# Altium PCB PDM.PcbDoc (part 3 of 4)
Units mm, origin at the board's own origin, x right, y up, seen from the top; angles counter-clockwise.
Board outline 144.75 x 149.75 mm, 4 copper layers (Top Layer, GND, 3V3, Bottom Layer), stack 1.792 mm thick; 174 components, 85 nets, 467 pads, 47 vias.
Unrouted connection lines stored in the file: 147.
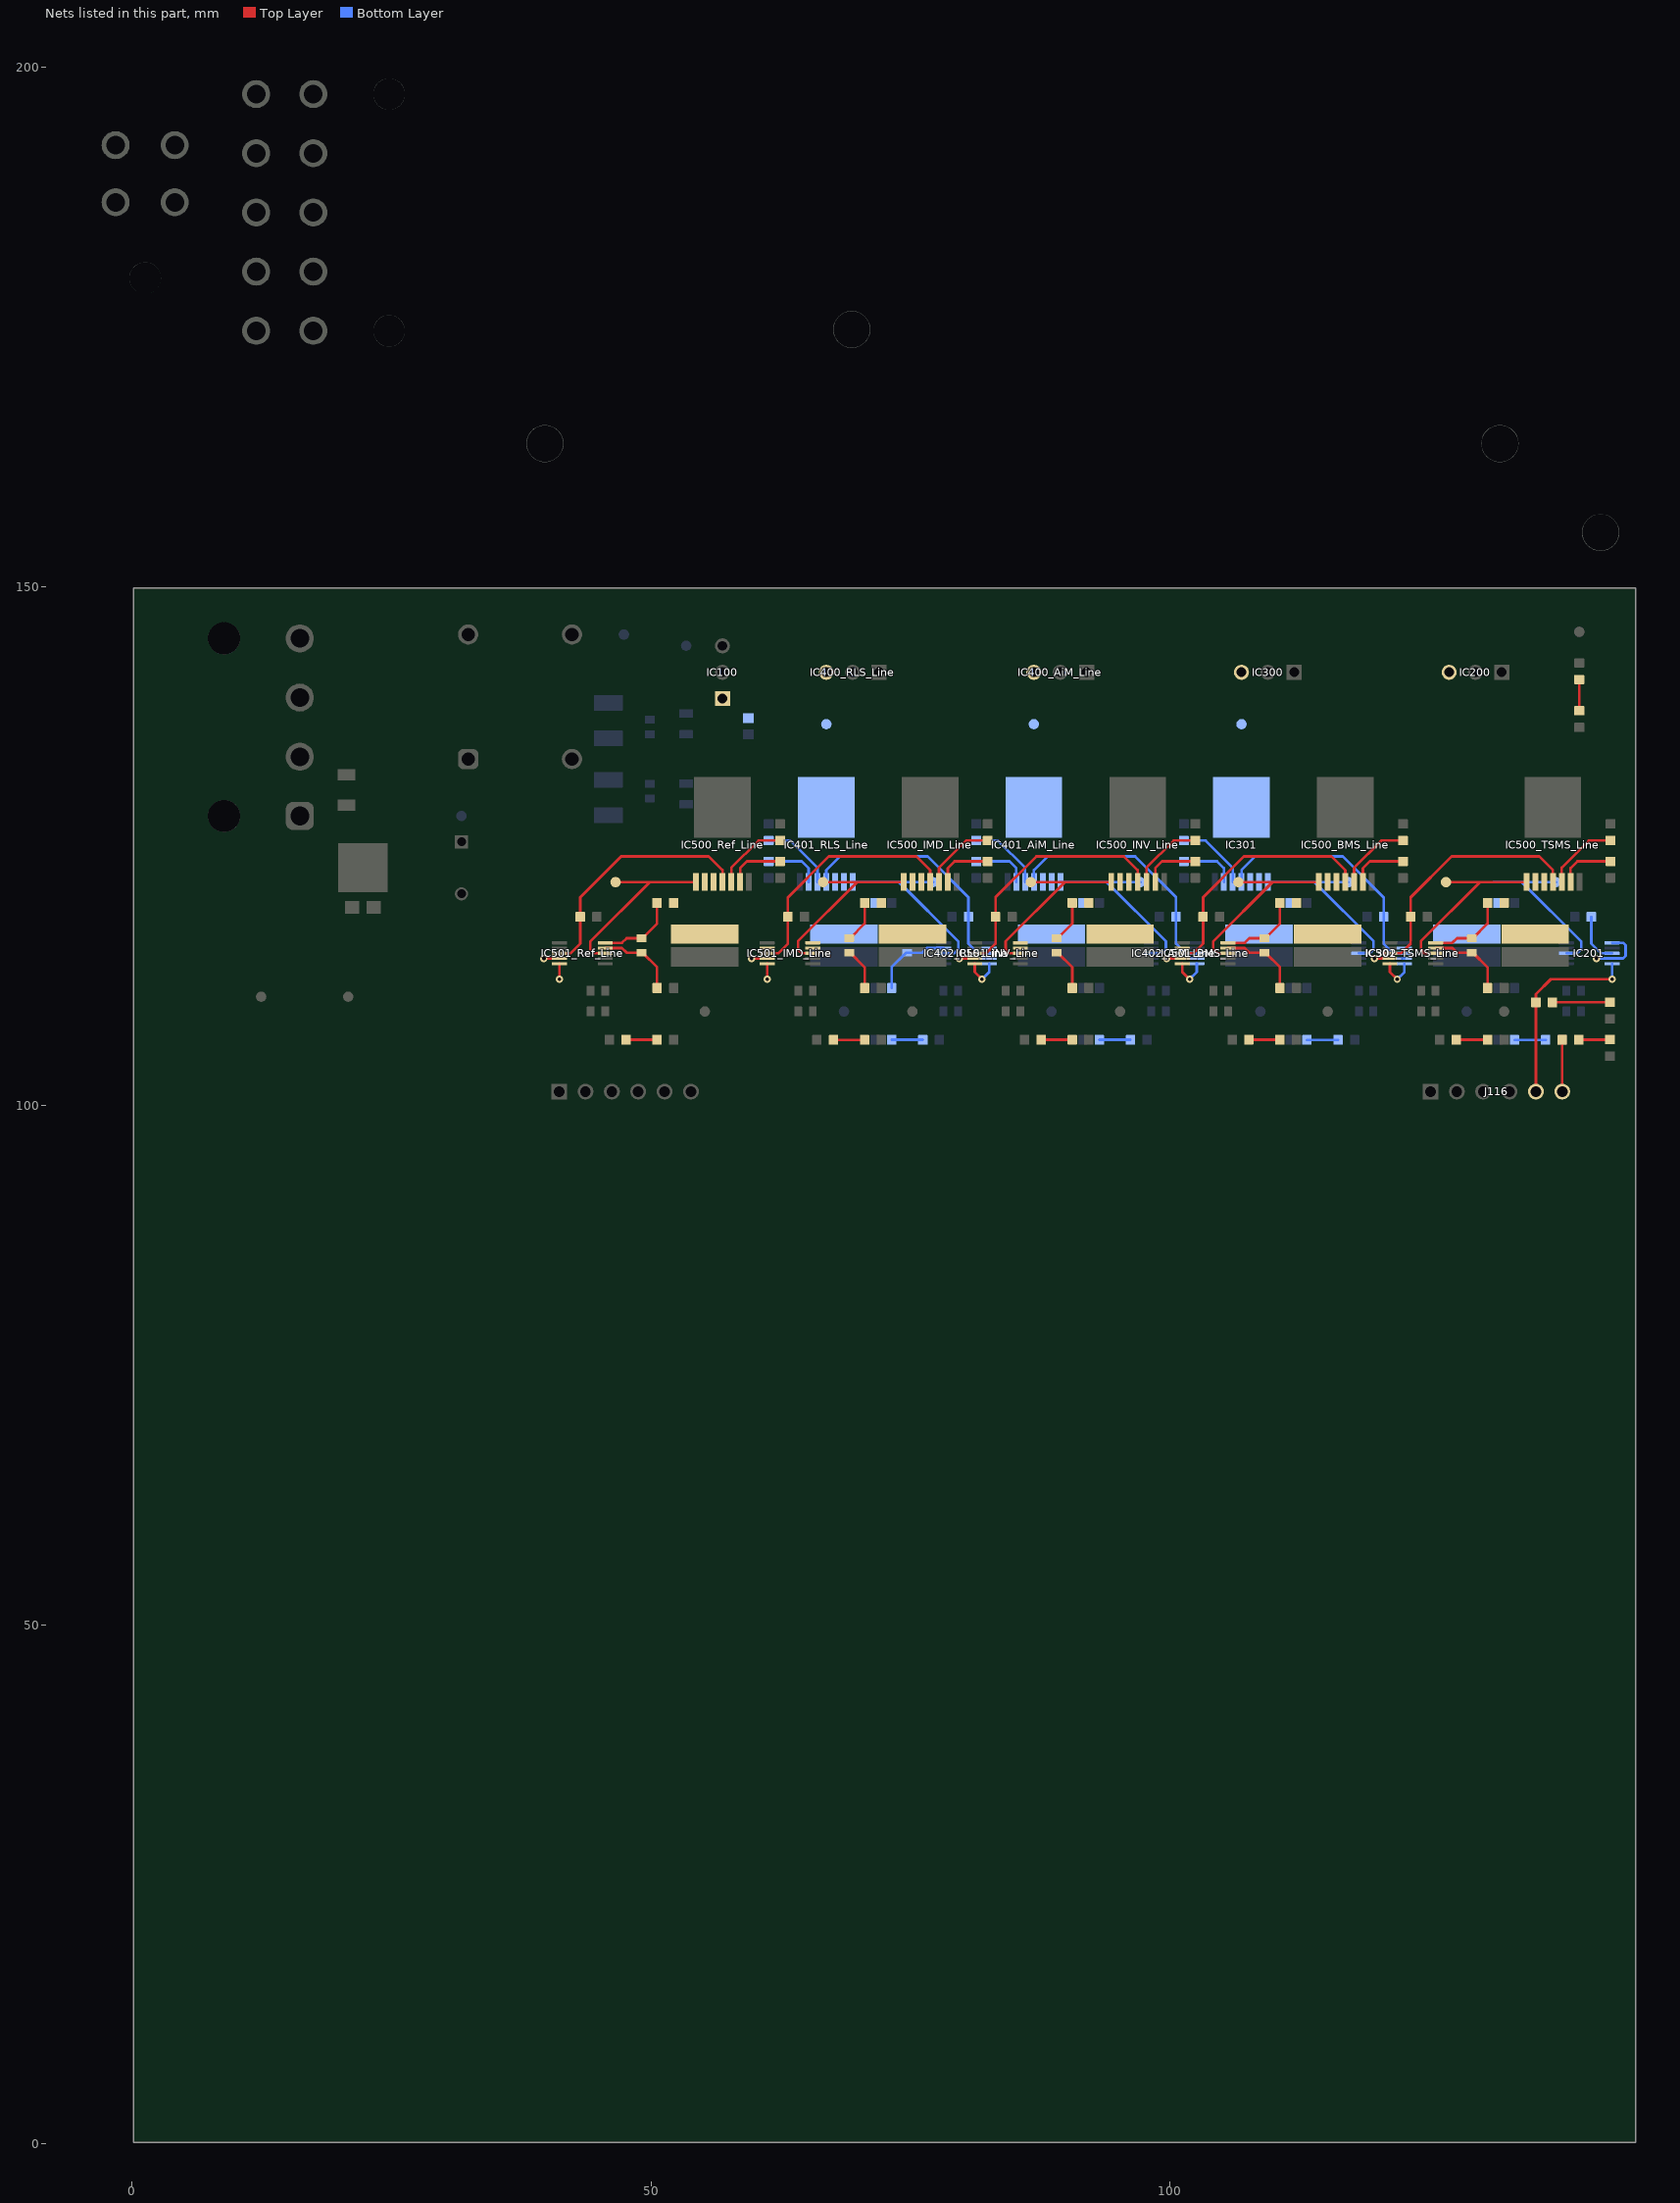
[diagram p3: the nets of this part, all layers, seen from the top]

## Via types
v1: diameter 0.7, hole 0.35, Top Layer to Bottom Layer, 47 vias

## Nets (pads, with @x,y where several pads share a name; then routed paths per layer and width w, separated by ;. In a path a pad name is that pad's centre, name@x,y a point inside that pad or via, vN(x,y) a via of type N, cw(c..) or ccw(c..) an arc to the next point about the centre after c; other vN are vias at no path point) (continued)
NetC400_RLS_Line_2: C400_RLS_Line.2 IC402_RLS_Line.9 R404_RLS_Line.1 | length 7.8
  Bottom Layer w0.254: R404_RLS_Line.1@73.185,111.326 73.185,113.321 74.59,114.726 C400_RLS_Line.2@74.685,114.726 76.121,114.726 76.571,115.176 IC402_RLS_Line.9@78.185,115.176
NetC500_BMS_Line_1: C500_BMS_Line.1 IC501_BMS_Line.10 R504_BMS_Line.1 | length 7.7
  Top Layer w0.254: IC501_BMS_Line.10@105.585,115.676 107.198,115.676 107.648,116.126 C500_BMS_Line.1@109.085,116.126 ; C500_BMS_Line.1@109.18,116.126 110.585,117.531 R504_BMS_Line.1@110.585,119.526
NetC500_BMS_Line_2: C500_BMS_Line.2 IC501_BMS_Line.9 R505_BMS_Line.1 | length 7.7
  Top Layer w0.254: IC501_BMS_Line.9@105.585,115.176 107.198,115.176 107.648,114.726 C500_BMS_Line.2@109.085,114.726 ; C500_BMS_Line.2@109.18,114.726 110.585,113.321 R505_BMS_Line.1@110.585,111.326
NetC500_IMD_Line_1: C500_IMD_Line.1 IC501_IMD_Line.10 R504_IMD_Line.1 | length 4
  Top Layer w0.254: C500_IMD_Line.1@69.18,116.126 70.585,117.531 R504_IMD_Line.1@70.585,119.526
NetC500_IMD_Line_2: C500_IMD_Line.2 IC501_IMD_Line.9 R505_IMD_Line.1 | length 4
  Top Layer w0.254: C500_IMD_Line.2@69.18,114.726 70.585,113.321 R505_IMD_Line.1@70.585,111.326
NetC500_INV_Line_1: C500_INV_Line.1 IC501_INV_Line.10 R504_INV_Line.1 | length 4
  Top Layer w0.254: C500_INV_Line.1@89.18,116.126 90.585,117.531 R504_INV_Line.1@90.585,119.526
NetC500_INV_Line_2: C500_INV_Line.2 IC501_INV_Line.9 R505_INV_Line.1 | length 4
  Top Layer w0.254: C500_INV_Line.2@89.18,114.726 90.585,113.321 R505_INV_Line.1@90.585,111.326
NetC500_Ref_Line_1: C500_Ref_Line.1 IC501_Ref_Line.10 R504_Ref_Line.1 | length 7.8
  Top Layer w0.254: IC501_Ref_Line.10@45.585,115.676 47.198,115.676 47.648,116.126 C500_Ref_Line.1@49.085,116.126 49.18,116.126 50.585,117.531 R504_Ref_Line.1@50.585,119.526
NetC500_Ref_Line_2: C500_Ref_Line.2 IC501_Ref_Line.9 R505_Ref_Line.1 | length 7.8
  Top Layer w0.254: IC501_Ref_Line.9@45.585,115.176 47.198,115.176 47.648,114.726 C500_Ref_Line.2@49.085,114.726 49.18,114.726 50.585,113.321 R505_Ref_Line.1@50.585,111.326
NetC500_TSMS_Line_1: C500_TSMS_Line.1 IC501_TSMS_Line.10 R504_TSMS_Line.1 | length 7.7
  Top Layer w0.254: IC501_TSMS_Line.10@125.585,115.676 127.198,115.676 127.648,116.126 C500_TSMS_Line.1@129.085,116.126 ; C500_TSMS_Line.1@129.18,116.126 130.585,117.531 R504_TSMS_Line.1@130.585,119.526
NetC500_TSMS_Line_2: C500_TSMS_Line.2 IC501_TSMS_Line.9 R505_TSMS_Line.1 | length 7.7
  Top Layer w0.254: IC501_TSMS_Line.9@125.585,115.176 127.198,115.176 127.648,114.726 C500_TSMS_Line.2@129.085,114.726 ; C500_TSMS_Line.2@129.18,114.726 130.585,113.321 R505_TSMS_Line.1@130.585,111.326
NetF100_2: F100.2 IC100.1
NetIC200_3: IC200.3 IC201.8 R200.2 R202.2 TP200.1 | length 16.4
  Bottom Layer w0.254: 131.191,121.526 133.896,121.526 ; TP200.1@137.185,121.526 TP200.1@137.139,121.526 133.896,121.526 ; IC201.8@138.185,114.676 139.226,114.676 139.605,115.055 139.605,115.817 133.896,121.526
NetIC201_3: IC201.3 R204.2 | length 5
  Bottom Layer w0.254: R204.2@140.585,118.176 140.585,115.603 141.512,114.676 IC201.3@142.585,114.676
NetIC300_3: IC300.3 IC301.Tab TP300.1
NetIC301_1: IC301.1 IC301.2 IC301.3 IC302.8 R302.2 R304.2 TP301.1 | length 18.2
  Bottom Layer w0.254: IC301.1@109.435,121.526 113.896,121.526 ; TP301.1@117.185,121.526 113.896,121.526 ; IC302.8@118.185,114.676 119.226,114.676 119.605,115.055 119.605,115.817 113.896,121.526
NetIC301_4: IC301.4 IC302.3 R306.2 | length 23.9
  Bottom Layer w0.254: IC301.4@106.885,121.526 106.885,122.677 108.21,124.003 116.642,124.003 120.585,120.06 R306.2@120.585,118.176 120.585,115.603 121.512,114.676 IC302.3@122.585,114.676
NetIC301_5: IC301.5 R300.1 | length 7.2
  Bottom Layer w0.254: R300.1@101.335,125.526 103.419,125.526 106.035,122.91 IC301.5@106.035,121.526
NetIC301_6: IC301.6 R301.1 | length 5.5
  Bottom Layer w0.254: R301.1@101.335,123.526 104.529,123.526 105.185,122.871 IC301.6@105.185,121.526
NetIC400_AiM_Line_3: IC400_AiM_Line.3 IC401_AiM_Line.Tab TP400_AiM_Line.1
NetIC400_RLS_Line_3: IC400_RLS_Line.3 IC401_RLS_Line.Tab TP400_RLS_Line.1
NetIC401_AiM_Line_1: IC401_AiM_Line.1 IC401_AiM_Line.2 IC401_AiM_Line.3 IC402_AiM_Line.8 R401_AiM_Line.2 R403_AiM_Line.2 TP401_AiM_Line.1 | length 18.2
  Bottom Layer w0.254: IC401_AiM_Line.1@89.435,121.526 93.896,121.526 ; TP401_AiM_Line.1@97.185,121.526 93.896,121.526 ; IC402_AiM_Line.8@98.185,114.676 99.226,114.676 99.605,115.055 99.605,115.817 93.896,121.526
NetIC401_AiM_Line_4: IC401_AiM_Line.4 IC402_AiM_Line.3 R406_AiM_Line.2 | length 23.9
  Bottom Layer w0.254: IC401_AiM_Line.4@86.885,121.526 86.885,122.677 88.21,124.003 96.642,124.003 100.585,120.06 R406_AiM_Line.2@100.585,118.176 100.585,115.603 101.512,114.676 IC402_AiM_Line.3@102.585,114.676
NetIC401_AiM_Line_5: IC401_AiM_Line.5 R400_AiM_Line.1 | length 7.2
  Bottom Layer w0.254: 81.335,125.526 83.419,125.526 86.035,122.91 IC401_AiM_Line.5@86.035,121.526
NetIC401_AiM_Line_6: IC401_AiM_Line.6 R402_AiM_Line.1 | length 5.5
  Bottom Layer w0.254: 81.335,123.526 84.529,123.526 85.185,122.871 IC401_AiM_Line.6@85.185,121.526
NetIC401_RLS_Line_1: IC401_RLS_Line.1 IC401_RLS_Line.2 IC401_RLS_Line.3 IC402_RLS_Line.8 R401_RLS_Line.2 R403_RLS_Line.2 TP401_RLS_Line.1 | length 18.2
  Bottom Layer w0.254: IC401_RLS_Line.1@69.435,121.526 73.896,121.526 ; TP401_RLS_Line.1@77.185,121.526 73.896,121.526 ; IC402_RLS_Line.8@78.185,114.676 79.226,114.676 79.605,115.055 79.605,115.817 73.896,121.526
NetIC401_RLS_Line_4: IC401_RLS_Line.4 IC402_RLS_Line.3 R406_RLS_Line.2 | length 23.9
  Bottom Layer w0.254: IC401_RLS_Line.4@66.885,121.526 66.885,122.677 68.21,124.003 76.642,124.003 80.585,120.06 R406_RLS_Line.2@80.585,118.176 80.585,115.603 81.512,114.676 IC402_RLS_Line.3@82.585,114.676
NetIC401_RLS_Line_5: IC401_RLS_Line.5 R400_RLS_Line.1 | length 7.2
  Bottom Layer w0.254: 61.335,125.526 63.419,125.526 66.035,122.911 IC401_RLS_Line.5@66.035,121.526
NetIC401_RLS_Line_6: IC401_RLS_Line.6 R402_RLS_Line.1 | length 5.5
  Bottom Layer w0.254: 61.335,123.526 64.529,123.526 65.185,122.871 IC401_RLS_Line.6@65.185,121.526
NetIC500_BMS_Line_1: IC500_BMS_Line.1 IC500_BMS_Line.2 IC500_BMS_Line.3 IC501_BMS_Line.8 R502_BMS_Line.2 R504_BMS_Line.2 TP501_BMS_Line.1 | length 18.2
  Top Layer w0.254: IC501_BMS_Line.8@105.585,114.676 104.543,114.676 104.164,115.055 104.164,115.817 109.873,121.526 ; TP501_BMS_Line.1@106.585,121.526 109.873,121.526 ; IC500_BMS_Line.1@114.335,121.526 109.873,121.526
NetIC500_BMS_Line_4: IC500_BMS_Line.4 IC501_BMS_Line.3 R506_BMS_Line.1 | length 23.9
  Top Layer w0.254: IC501_BMS_Line.3@101.185,114.676 102.257,114.676 103.185,115.604 R506_BMS_Line.1@103.185,118.176 103.185,120.06 107.127,124.003 115.559,124.003 116.885,122.677 IC500_BMS_Line.4@116.885,121.526
NetIC500_BMS_Line_5: IC500_BMS_Line.5 R500_BMS_Line.1 | length 7.2
  Top Layer w0.254: IC500_BMS_Line.5@117.735,121.526 117.735,122.911 120.35,125.526 R500_BMS_Line.1@122.435,125.526
NetIC500_BMS_Line_6: IC500_BMS_Line.6 R501_BMS_Line.1 | length 5.5
  Top Layer w0.254: IC500_BMS_Line.6@118.585,121.526 118.585,122.871 119.24,123.526 R501_BMS_Line.1@122.435,123.526
NetIC500_IMD_Line_1: IC500_IMD_Line.1 IC500_IMD_Line.2 IC500_IMD_Line.3 IC501_IMD_Line.8 R502_IMD_Line.2 R504_IMD_Line.2 TP501_IMD_Line.1 | length 18.2
  Top Layer w0.254: IC501_IMD_Line.8@65.585,114.676 64.543,114.676 64.164,115.055 64.164,115.817 69.873,121.526 ; TP501_IMD_Line.1@66.585,121.526 69.873,121.526 ; IC500_IMD_Line.1@74.335,121.526 69.873,121.526
NetIC500_IMD_Line_4: IC500_IMD_Line.4 IC501_IMD_Line.3 R506_IMD_Line.1 | length 23.9
  Top Layer w0.254: IC501_IMD_Line.3@61.185,114.676 62.257,114.676 63.185,115.604 R506_IMD_Line.1@63.185,118.176 63.185,120.06 67.127,124.003 75.559,124.003 76.885,122.677 IC500_IMD_Line.4@76.885,121.526
NetIC500_IMD_Line_5: IC500_IMD_Line.5 R500_IMD_Line.1 | length 7.2
  Top Layer w0.254: IC500_IMD_Line.5@77.735,121.526 77.735,122.911 80.35,125.526 R500_IMD_Line.1@82.435,125.526
NetIC500_IMD_Line_6: IC500_IMD_Line.6 R501_IMD_Line.1 | length 5.5
  Top Layer w0.254: IC500_IMD_Line.6@78.585,121.526 78.585,122.871 79.24,123.526 R501_IMD_Line.1@82.435,123.526
NetIC500_INV_Line_1: IC500_INV_Line.1 IC500_INV_Line.2 IC500_INV_Line.3 IC501_INV_Line.8 R502_INV_Line.2 R504_INV_Line.2 TP501_INV_Line.1 | length 18.2
  Top Layer w0.254: IC501_INV_Line.8@85.585,114.676 84.543,114.676 84.164,115.055 84.164,115.817 89.873,121.526 ; TP501_INV_Line.1@86.585,121.526 89.873,121.526 ; IC500_INV_Line.1@94.335,121.526 89.873,121.526
NetIC500_INV_Line_4: IC500_INV_Line.4 IC501_INV_Line.3 R506_INV_Line.1 | length 23.9
  Top Layer w0.254: IC501_INV_Line.3@81.185,114.676 82.257,114.676 83.185,115.604 R506_INV_Line.1@83.185,118.176 83.185,120.06 87.127,124.003 95.559,124.003 96.885,122.677 IC500_INV_Line.4@96.885,121.526
NetIC500_INV_Line_5: IC500_INV_Line.5 R500_INV_Line.1 | length 7.2
  Top Layer w0.254: IC500_INV_Line.5@97.735,121.526 97.735,122.911 100.35,125.526 R500_INV_Line.1@102.435,125.526
NetIC500_INV_Line_6: IC500_INV_Line.6 R501_INV_Line.1 | length 5.5
  Top Layer w0.254: IC500_INV_Line.6@98.585,121.526 98.585,122.871 99.24,123.526 R501_INV_Line.1@102.435,123.526
NetIC500_Ref_Line_1: IC500_Ref_Line.1 IC500_Ref_Line.2 IC500_Ref_Line.3 IC501_Ref_Line.8 R502_Ref_Line.2 R504_Ref_Line.2 TP501_Ref_Line.1 | length 18.2
  Top Layer w0.254: IC501_Ref_Line.8@45.585,114.676 44.543,114.676 44.164,115.055 44.164,115.817 49.873,121.526 ; TP501_Ref_Line.1@46.585,121.526 49.873,121.526 ; IC500_Ref_Line.1@54.335,121.526 49.873,121.526
NetIC500_Ref_Line_4: IC500_Ref_Line.4 IC501_Ref_Line.3 R506_Ref_Line.1 | length 23.9
  Top Layer w0.254: IC501_Ref_Line.3@41.185,114.676 42.257,114.676 43.185,115.604 R506_Ref_Line.1@43.185,118.176 43.185,120.06 47.127,124.003 55.559,124.003 56.885,122.677 IC500_Ref_Line.4@56.885,121.526
NetIC500_Ref_Line_5: IC500_Ref_Line.5 R500_Ref_Line.1 | length 7.2
  Top Layer w0.254: IC500_Ref_Line.5@57.735,121.526 57.735,122.911 60.35,125.526 R500_Ref_Line.1@62.435,125.526
NetIC500_Ref_Line_6: IC500_Ref_Line.6 R501_Ref_Line.1 | length 5.5
  Top Layer w0.254: IC500_Ref_Line.6@58.585,121.526 58.585,122.871 59.24,123.526 R501_Ref_Line.1@62.435,123.526
NetIC500_TSMS_Line_1: IC500_TSMS_Line.1 IC500_TSMS_Line.2 IC500_TSMS_Line.3 IC501_TSMS_Line.8 R502_TSMS_Line.2 R504_TSMS_Line.2 TP501_TSMS_Line.1 | length 18.2
  Top Layer w0.254: IC501_TSMS_Line.8@125.585,114.676 124.543,114.676 124.164,115.055 124.164,115.817 129.873,121.526 ; TP501_TSMS_Line.1@126.585,121.526 129.873,121.526 ; IC500_TSMS_Line.1@134.335,121.526 129.873,121.526
NetIC500_TSMS_Line_4: IC500_TSMS_Line.4 IC501_TSMS_Line.3 R506_TSMS_Line.1 | length 23.9
  Top Layer w0.254: IC501_TSMS_Line.3@121.185,114.676 122.257,114.676 123.185,115.604 R506_TSMS_Line.1@123.185,118.176 123.185,120.06 127.127,124.003 135.559,124.003 136.885,122.677 IC500_TSMS_Line.4@136.885,121.526
NetIC500_TSMS_Line_5: IC500_TSMS_Line.5 R500_TSMS_Line.1 | length 7.2
  Top Layer w0.254: IC500_TSMS_Line.5@137.735,121.526 137.735,122.911 140.35,125.526 R500_TSMS_Line.1@142.435,125.526
NetIC500_TSMS_Line_6: IC500_TSMS_Line.6 R501_TSMS_Line.1 | length 5.5
  Top Layer w0.254: IC500_TSMS_Line.6@138.585,121.526 138.585,122.871 139.24,123.526 R501_TSMS_Line.1@142.435,123.526
NetL100_A: L100.A R100.1 | length 3
  Top Layer w0.254: L100.A@139.425,138.03 R100.1@139.425,141.03
NetL200_A: L200.A R201.1 | length 3
  Bottom Layer w0.254: R201.1@133.185,106.326 L200.A@136.185,106.326
NetL300_A: L300.A R303.1 | length 3
  Bottom Layer w0.254: R303.1@113.185,106.326 L300.A@116.185,106.326
NetL400_AiM_Line_A: L400_AiM_Line.A R405_AiM_Line.1 | length 3
  Bottom Layer w0.254: R405_AiM_Line.1@93.185,106.35 L400_AiM_Line.A@96.185,106.35
NetL400_RLS_Line_A: L400_RLS_Line.A R405_RLS_Line.1 | length 3
  Bottom Layer w0.254: R405_RLS_Line.1@73.185,106.35 L400_RLS_Line.A@76.185,106.35
NetL500_BMS_Line_A: L500_BMS_Line.A R503_BMS_Line.1 | length 3
  Top Layer w0.254: L500_BMS_Line.A@107.585,106.35 R503_BMS_Line.1@110.585,106.35
NetL500_IMD_Line_A: L500_IMD_Line.A R503_IMD_Line.1 | length 3
  Top Layer w0.254: L500_IMD_Line.A@67.585,106.326 R503_IMD_Line.1@70.585,106.326
NetL500_INV_Line_A: L500_INV_Line.A R503_INV_Line.1 | length 3
  Top Layer w0.254: L500_INV_Line.A@87.585,106.35 R503_INV_Line.1@90.585,106.35
NetL500_Ref_Line_A: L500_Ref_Line.A R503_Ref_Line.1 | length 3
  Top Layer w0.254: L500_Ref_Line.A@47.585,106.35 R503_Ref_Line.1@50.585,106.35
NetL500_TSMS_Line_A: L500_TSMS_Line.A R503_TSMS_Line.1 | length 3
  Top Layer w0.254: L500_TSMS_Line.A@127.585,106.35 R503_TSMS_Line.1@130.585,106.35
NetR101_2: R101.2 R103.2 | length 3
  Top Layer w0.254: R103.2@139.387,106.354 R101.2@142.387,106.354
NetR102_2: R102.2 R104.2 | length 5.5
  Top Layer w0.254: R104.2@136.847,109.954 R102.2@142.387,109.954
SCL: IC201.5 IC302.2 IC302.5 IC402_AiM_Line.5 IC402_RLS_Line.5 IC501_BMS_Line.2 IC501_BMS_Line.5 IC501_IMD_Line.5 IC501_INV_Line.5 IC501_Ref_Line.5 IC501_TSMS_Line.5 J116.5 R104.1 | length 32.6
  Top Layer w0.254: v1(41.185,112.176) IC501_Ref_Line.5@41.185,113.676 ; v1(61.185,112.176) IC501_IMD_Line.5@61.185,113.676 ; IC501_INV_Line.5@81.185,113.676 81.185,112.876 v1(81.885,112.176) ; IC501_BMS_Line.5@101.185,113.676 101.185,112.876 v1(101.885,112.176) ; IC501_TSMS_Line.5@121.185,113.676 121.185,112.876 v1(121.885,112.176) ; J116.5@135.247,101.354 R104.1@135.247,109.954 135.247,110.736 136.687,112.176 v1(142.585,112.176)
  Bottom Layer w0.254: v1(81.885,112.176) 82.585,112.876 IC402_RLS_Line.5@82.585,113.676 ; v1(101.885,112.176) 102.585,112.876 IC402_AiM_Line.5@102.585,113.676 ; v1(121.885,112.176) 122.585,112.876 IC302.5@122.585,113.676 ; v1(142.585,112.176) IC201.5@142.585,113.676
SDA: IC201.1 IC201.4 IC302.4 IC402_AiM_Line.4 IC402_RLS_Line.2 IC402_RLS_Line.4 IC501_BMS_Line.4 IC501_IMD_Line.2 IC501_IMD_Line.4 IC501_INV_Line.4 IC501_Ref_Line.4 IC501_TSMS_Line.4 J116.6 R103.1 | length 26.5
  Top Layer w0.254: v1(39.685,114.176) IC501_Ref_Line.4@41.185,114.176 ; v1(59.685,114.176) IC501_IMD_Line.4@61.185,114.176 ; v1(79.685,114.176) IC501_INV_Line.4@81.185,114.176 ; v1(99.685,114.176) IC501_BMS_Line.4@101.185,114.176 ; v1(119.685,114.176) IC501_TSMS_Line.4@121.185,114.176 ; J116.6@137.787,101.354 R103.1@137.787,106.354
  Bottom Layer w0.254: v1(79.685,114.176) IC402_RLS_Line.4@82.585,114.176 ; v1(99.685,114.176) IC402_AiM_Line.4@102.585,114.176 ; v1(119.685,114.176) IC302.4@122.585,114.176 ; v1(141.085,114.176) IC201.4@142.585,114.176 143.64,114.176 143.891,114.427 143.891,115.443 143.658,115.676 IC201.1@142.585,115.676
pads on no net: H100.1 H101.1 H102.1 H103.1 J100. J101. J109.5 J109.6 J117.1 J117.2 J117.3 J117.4 J117.5 J117.6

## Polygon pours and split planes (outlines as drawn)
NetIC500_INV_Line_1 on Top Layer "NETIC500_INV_LINE_1_L01_P033" (solid, pour order 33): 92.981,122.173 91.938,121.13 ccw(c92.792,120.276) 91.585,120.276 91.585,115.926 ccw(c92.084,115.926) 92.085,115.426 98.285,115.426 ccw(c98.285,115.926) 98.785,115.926 98.785,117.301 ccw(c97.577,117.301) 98.431,118.155 96.809,119.777 cw(c97.663,120.63) 96.456,120.63 96.456,122.526 93.835,122.526 ccw(c93.834,121.319)
NetIC500_TSMS_Line_1 on Top Layer "NETIC500_TSMS_LINE_1_L01_P035" (solid, pour order 35): 132.981,122.173 131.938,121.13 ccw(c132.792,120.276) 131.585,120.276 131.585,115.926 ccw(c132.084,115.926) 132.085,115.426 138.285,115.426 ccw(c138.285,115.926) 138.785,115.926 138.785,117.301 ccw(c137.577,117.301) 138.431,118.155 136.809,119.777 cw(c137.663,120.63) 136.456,120.63 136.456,122.526 133.835,122.526 ccw(c133.834,121.319)
NetIC500_BMS_Line_1 on Top Layer "NETIC500_BMS_LINE_1_L01_P034" (solid, pour order 34): 112.981,122.173 111.938,121.13 ccw(c112.792,120.276) 111.585,120.276 111.585,115.926 ccw(c112.084,115.926) 112.085,115.426 118.285,115.426 ccw(c118.285,115.926) 118.785,115.926 118.785,117.301 ccw(c117.577,117.301) 118.431,118.155 116.809,119.777 cw(c117.663,120.63) 116.456,120.63 116.456,122.526 113.835,122.526 ccw(c113.834,121.319)
NetIC500_IMD_Line_1 on Top Layer "NETIC500_IMD_LINE_1_L01_P032" (solid, pour order 32): 72.981,122.173 71.938,121.13 ccw(c72.792,120.276) 71.585,120.276 71.585,115.926 ccw(c72.084,115.926) 72.085,115.426 78.285,115.426 ccw(c78.285,115.926) 78.785,115.926 78.785,117.301 ccw(c77.577,117.301) 78.431,118.155 76.809,119.777 cw(c77.663,120.63) 76.456,120.63 76.456,122.526 73.835,122.526 ccw(c73.834,121.319)
NetIC500_Ref_Line_1 on Top Layer "NETIC500_REF_LINE_1_L01_P031" (solid, pour order 31): 52.981,122.173 51.938,121.13 ccw(c52.792,120.276) 51.585,120.276 51.585,115.926 ccw(c52.084,115.926) 52.085,115.426 58.285,115.426 ccw(c58.285,115.926) 58.785,115.926 58.785,117.301 ccw(c57.577,117.301) 58.431,118.155 56.809,119.777 cw(c57.663,120.63) 56.456,120.63 56.456,122.526 53.835,122.526 ccw(c53.834,121.319)
24V on Top Layer "24V_L01_P030" (solid, pour order 30): 79.725,149.909 145,150 145,125.526 42.368,125.526 cw(c42.368,128.009) 39.885,128.009 39.885,133.847 cw(c42.547,133.847) 42.547,136.509 53.661,136.509 ccw(c53.661,144.71) 59.464,138.915 63.861,143.319 cw(c79.757,127.446)
IN- on Top Layer "IN-_L01_P016" (solid, pour order 16): 16.167,130.4 cw(c16.167,127.897) 18.67,127.897 18.67,121.48 ccw(c20.09,121.48) 20.09,120.06 29.436,120.06 ccw(c29.436,121.267) 30.289,120.414 34.531,124.656 ccw(c33.678,125.509) 34.885,125.509 34.885,138.843 ccw(c33.678,138.843) 34.531,139.696 30.617,143.611 cw(c32.387,145.381) 30.617,147.151 cw(c32.383,145.385) 34.148,147.151 39.531,141.767 cw(c38.678,140.914) 39.885,140.914 39.885,123.438 cw(c38.678,123.438) 39.531,122.585 32.36,115.414 cw(c31.507,116.267) 31.507,115.06 18.67,115.06 cw(c18.67,120.06) 13.67,120.06 13.67,127.903 cw(c16.167,127.903)
NetC7_P on Top Layer "NETC7_P_L01_P015" (solid, pour order 15): 18.67,130.4 23.17,130.4 23.17,129.548 ccw(c24.529,129.548) 23.568,128.587 23.694,128.461 ccw(c24.547,129.315) 24.547,128.108 28.55,128.108 ccw(c28.55,129.315) 29.403,128.461 29.531,128.59 ccw(c28.678,129.443) 29.885,129.443 29.885,133.378 cw(c32.385,133.378) 32.385,135.878 cw(c32.385,133.378) 34.885,133.378 34.885,127.581 cw(c33.678,127.58) 34.531,126.727 28.218,120.414 cw(c27.365,121.267) 27.364,120.06 20.09,120.06 cw(c20.09,121.48) 18.67,121.48
IN+ on Top Layer "IN+_L01_P014" (solid, pour order 14): 17.97,131.1 18.67,130.4 23.17,130.4 23.17,133.416 ccw(c22.036,133.416) 22.838,134.218 21.31,135.746 ccw(c20.457,134.894) 20.456,136.1 16.17,136.1 ccw(c16.17,133.6) 13.67,133.6 ccw(c16.17,133.6) 16.17,131.1
IN+ on Top Layer "IN+_L01_P011" (solid, pour order 11): 17.97,131.1 18.67,130.4 23.17,130.4 23.17,133.416 ccw(c22.036,133.416) 22.838,134.218 21.31,135.746 ccw(c20.457,134.894) 20.456,136.1 16.17,136.1 ccw(c16.17,133.6) 13.67,133.6 ccw(c16.17,133.6) 16.17,131.1
NetC7_P on Top Layer "NETC7_P_L01_P012" (solid, pour order 12): 18.67,130.4 23.17,130.4 23.17,129.548 ccw(c24.529,129.548) 23.568,128.587 23.694,128.461 ccw(c24.547,129.315) 24.547,128.108 28.55,128.108 ccw(c28.55,129.315) 29.403,128.461 29.531,128.59 ccw(c28.678,129.443) 29.885,129.443 29.885,133.378 cw(c32.385,133.378) 32.385,135.878 cw(c32.385,133.378) 34.885,133.378 34.885,127.581 cw(c33.678,127.58) 34.531,126.727 28.218,120.414 cw(c27.365,121.267) 27.364,120.06 20.09,120.06 cw(c20.09,121.48) 18.67,121.48
IN- on Top Layer "IN-_L01_P013" (solid, pour order 13): 16.167,130.4 cw(c16.167,127.897) 18.67,127.897 18.67,121.48 ccw(c20.09,121.48) 20.09,120.06 29.436,120.06 ccw(c29.436,121.267) 30.289,120.414 34.531,124.656 ccw(c33.678,125.509) 34.885,125.509 34.885,138.843 ccw(c33.678,138.843) 34.531,139.696 30.617,143.611 cw(c32.387,145.381) 30.617,147.151 cw(c32.383,145.385) 34.148,147.151 39.531,141.767 cw(c38.678,140.914) 39.885,140.914 39.885,123.438 cw(c38.678,123.438) 39.531,122.585 32.36,115.414 cw(c31.507,116.267) 31.507,115.06 18.67,115.06 cw(c18.67,120.06) 13.67,120.06 13.67,127.903 cw(c16.167,127.903)
NetIC301_1 on Bottom Layer "NETIC301_1_L04_P042" (solid, pour order 42): 110.788,122.173 111.831,121.13 cw(c110.977,120.276) 112.185,120.276 112.185,115.926 cw(c111.685,115.926) 111.685,115.426 105.485,115.426 cw(c105.485,115.926) 104.985,115.926 104.985,117.301 cw(c106.192,117.301) 105.338,118.155 106.96,119.777 ccw(c106.106,120.63) 107.313,120.63 107.313,122.526 109.935,122.526 cw(c109.935,121.319)
NetIC401_AiM_Line_1 on Bottom Layer "NETIC401_AIM_LINE_1_L04_P041" (solid, pour order 41): 90.788,122.173 91.831,121.13 cw(c90.977,120.276) 92.185,120.276 92.185,115.926 cw(c91.685,115.926) 91.685,115.426 85.485,115.426 cw(c85.485,115.926) 84.985,115.926 84.985,117.301 cw(c86.192,117.301) 85.338,118.155 86.96,119.777 ccw(c86.106,120.63) 87.313,120.63 87.313,122.526 89.935,122.526 cw(c89.935,121.319)
NetIC401_RLS_Line_1 on Bottom Layer "NETIC401_RLS_LINE_1_L04_P040" (solid, pour order 40): 70.788,122.173 71.831,121.13 cw(c70.977,120.276) 72.185,120.276 72.185,115.926 cw(c71.685,115.926) 71.685,115.426 65.485,115.426 cw(c65.485,115.926) 64.985,115.926 64.985,117.301 cw(c66.192,117.301) 65.338,118.155 66.96,119.777 ccw(c66.106,120.63) 67.313,120.63 67.313,122.526 69.935,122.526 cw(c69.935,121.319)
24V on Bottom Layer "24V_L04_P029" (solid, pour order 29): 79.725,149.909 145,150 145,125.526 42.368,125.526 cw(c42.368,128.009) 39.885,128.009 39.885,133.847 cw(c42.547,133.847) 42.547,136.509 53.661,136.509 ccw(c53.661,144.71) 59.464,138.915 63.861,143.319 cw(c79.757,127.446)
NetIC200_3 on Bottom Layer "Bottom Layer-NetIC400_RLS_Line_3" (solid, pour order 27): 132.185,115.426 132.184,120.252 ccw(c130.978,120.252) 131.831,121.105 128.238,124.698 cw(c129.092,125.552) 127.885,125.552 127.885,141.74 ccw(c126.885,141.74) 126.885,142.74 ccw(c126.885,141.74) 125.885,141.74 125.884,120.176 cw(c124.678,120.176) 125.531,119.323 125.363,119.155 ccw(c126.276,118.242) 124.984,118.241 124.985,115.426
NetIC300_3 on Bottom Layer "Bottom Layer-NetIC400_RLS_Line_3" (solid, pour order 26): 109.814,125.526 ccw(c109.814,126.026) 110.314,126.026 110.314,130.164 ccw(c107.197,130.164) 109.401,132.367 109.029,132.739 cw(c111.791,135.502) 107.885,135.502 107.885,141.74 ccw(c106.885,141.74) 106.885,142.74 ccw(c106.885,141.74) 105.885,141.74 105.885,135.502 cw(c101.978,135.502) 104.74,132.739 104.368,132.367 ccw(c106.572,130.164) 103.456,130.164 103.456,126.026 ccw(c103.956,126.026) 103.956,125.526
NetIC400_AiM_Line_3 on Bottom Layer "Bottom Layer-NetIC400_RLS_Line_3" (solid, pour order 21): 89.814,125.526 ccw(c89.814,126.026) 90.314,126.026 90.314,130.164 ccw(c87.197,130.164) 89.401,132.367 89.029,132.739 cw(c91.791,135.502) 87.885,135.502 87.885,141.74 ccw(c86.885,141.74) 86.885,142.74 ccw(c86.885,141.74) 85.885,141.74 85.885,135.502 cw(c81.978,135.502) 84.74,132.739 84.368,132.367 ccw(c86.572,130.164) 83.456,130.164 83.456,126.026 ccw(c83.956,126.026) 83.956,125.526
NetIC400_RLS_Line_3 on Bottom Layer "Bottom Layer-NetIC400_RLS_Line_3" (solid, pour order 19): 69.814,125.526 ccw(c69.814,126.026) 70.314,126.026 70.314,130.164 ccw(c67.197,130.164) 69.401,132.367 69.029,132.739 cw(c71.791,135.502) 67.885,135.502 67.885,141.74 ccw(c66.885,141.74) 66.885,142.74 ccw(c66.885,141.74) 65.885,141.74 65.885,135.502 cw(c61.978,135.502) 64.74,132.739 64.368,132.367 ccw(c66.572,130.164) 63.456,130.164 63.456,126.026 ccw(c63.956,126.026) 63.956,125.526
no net on Bottom Layer "NONET_L04_P020" (solid, pour order 20): 63.419,125.526 70.314,125.526 70.314,130.454
IN+ on Bottom Layer "IN+_L04_P009" (solid, pour order 9): 17.97,131.1 18.67,130.4 23.17,130.4 23.17,133.416 ccw(c22.036,133.416) 22.838,134.218 21.31,135.746 ccw(c20.457,134.894) 20.456,136.1 16.17,136.1 ccw(c16.17,133.6) 13.67,133.6 ccw(c16.17,133.6) 16.17,131.1
NetC7_P on Bottom Layer "NETC7_P_L04_P008" (solid, pour order 8): 18.67,130.4 23.17,130.4 23.17,129.548 ccw(c24.529,129.548) 23.568,128.587 23.694,128.461 ccw(c24.547,129.315) 24.547,128.108 28.55,128.108 ccw(c28.55,129.315) 29.403,128.461 29.531,128.59 ccw(c28.678,129.443) 29.885,129.443 29.885,133.378 cw(c32.385,133.378) 32.385,135.878 cw(c32.385,133.378) 34.885,133.378 34.885,127.581 cw(c33.678,127.58) 34.531,126.727 28.218,120.414 cw(c27.365,121.267) 27.364,120.06 20.09,120.06 cw(c20.09,121.48) 18.67,121.48
IN- on Bottom Layer "IN-_L04_P010" (solid, pour order 10): 16.167,130.4 cw(c16.167,127.897) 18.67,127.897 18.67,121.48 ccw(c20.09,121.48) 20.09,120.06 29.436,120.06 ccw(c29.436,121.267) 30.289,120.414 34.531,124.656 ccw(c33.678,125.509) 34.885,125.509 34.885,138.843 ccw(c33.678,138.843) 34.531,139.696 30.617,143.611 cw(c32.387,145.381) 30.617,147.151 cw(c32.383,145.385) 34.148,147.151 39.531,141.767 cw(c38.678,140.914) 39.885,140.914 39.885,123.438 cw(c38.678,123.438) 39.531,122.585 32.36,115.414 cw(c31.507,116.267) 31.507,115.06 18.67,115.06 cw(c18.67,120.06) 13.67,120.06 13.67,127.903 cw(c16.167,127.903)
24V on 3V3 "24V_L03_P025" (solid, pour order 25): 79.725,149.909 145,150 145,125.526 42.368,125.526 cw(c42.368,128.009) 39.885,128.009 39.885,133.847 cw(c42.547,133.847) 42.547,136.509 53.661,136.509 ccw(c53.661,144.71) 59.464,138.915 63.861,143.319 cw(c79.757,127.446)

## Keep-outs
Keep-Out Layer:
  lines w0.254: 0,0 145,0 145,150 0,150 0,0

## Silkscreen, mask and mechanical layers (free items; w line width, h text height)
Top Overlay:
  circle w0.254: c58.785,117.801 r0.5
  circle w0.254: c56.456,120.13 r0.5
  circle w0.254: c58.785,115.426 r0.5
  circle w0.254: c51.585,115.426 r0.5
  circle w0.254: c51.585,120.776 r0.5
  circle w0.254: c53.335,122.526 r0.5
  lines w0.1: 51.085,115.426 52.085,115.426 ; 51.585,120.276 51.585,121.276 ; 52.981,122.173 53.688,122.88 ; 56.102,120.484 56.809,119.777 ; 58.285,115.426 59.285,115.426 ; 58.431,118.155 59.138,117.448
Mechanical 1:
  lines w0.254: 0,0 145,0 145,150 0,150 0,0
Mechanical 17:
  circle w0.013: c217.936,172.461 r1.45
  circle w0.013: c217.936,191.461 r1.45
  circle w0.013: c217.936,172.461 r1.25
  circle w0.013: c207.936,181.961 r9
  circle w0.013: c207.936,181.961 r8
  circle w0.013: c217.936,191.461 r1.25
  circle w0.006: c207.936,96.961 r0.003
  circle w0.013: c217.936,172.461 r1.45
  circle w0.013: c217.936,191.461 r1.45
  circle w0.013: c217.936,172.461 r1.25
  circle w0.013: c207.936,181.961 r9
  circle w0.013: c207.936,181.961 r8
  circle w0.013: c217.936,191.461 r1.25
  circle w0.006: c207.936,96.961 r0.003
  lines w0.013: 203.936,163.761 203.936,173.899 203.936,163.761 ; 203.936,163.761 203.936,165.761 ; 203.936,163.761 225.636,163.761 ; 203.936,163.761 203.936,165.761 ; 203.936,163.761 225.636,163.761 ; 203.936,165.761 223.636,165.761 ; 203.936,165.761 223.636,165.761 ; 203.936,198.161 203.936,200.161 ; 203.936,198.161 223.636,198.161 ; 203.936,198.161 203.936,190.024 203.936,198.161 ; 203.936,198.161 203.936,200.161 ; 203.936,198.161 223.636,198.161 ; 203.936,200.161 225.636,200.161 ; 203.936,200.161 225.636,200.161 ; 223.636,165.761 223.636,198.161 ; 223.636,165.761 223.636,198.161 ; 225.636,163.761 225.636,200.161 ; 225.636,163.761 225.636,200.161
Mechanical 18:
  circle w0.013: c207.936,145.961 r4
  circle w0.013: c158.936,145.961 r4
  circle w0.013: c158.936,47.961 r4
  circle w0.006: c207.936,96.961 r0.003
  circle w0.013: c207.936,145.961 r4
  circle w0.013: c158.936,145.961 r4
  circle w0.013: c158.936,47.961 r4
  circle w0.006: c207.936,96.961 r0.003
Mechanical 19:
  circle w0.013: c207.936,145.961 r2.2
  circle w0.013: c158.936,47.961 r4
  circle w0.013: c207.936,145.961 r4
  circle w0.013: c158.936,145.961 r4
  circle w0.006: c207.936,96.961 r0.003
  circle w0.013: c207.936,145.961 r2.2
  circle w0.013: c158.936,47.961 r4
  circle w0.013: c207.936,145.961 r4
  circle w0.013: c158.936,145.961 r4
  circle w0.006: c207.936,96.961 r0.003
Mechanical 21:
  circle w0.013: c207.936,208.161 r4
  circle w0.013: c207.936,208.161 r2.2
  circle w0.013: c158.936,145.961 r4
  circle w0.013: c158.936,47.961 r4
  circle w0.006: c207.936,96.961 r0.003
  circle w0.013: c207.936,208.161 r4
  circle w0.013: c207.936,208.161 r2.2
  circle w0.013: c158.936,145.961 r4
  circle w0.013: c158.936,47.961 r4
  circle w0.006: c207.936,96.961 r0.003
Mechanical 22:
  circle w0.013: c207.936,145.961 r4
  circle w0.013: c207.936,145.961 r2.2
  circle w0.013: c207.936,145.961 r4
  circle w0.013: c207.936,208.161 r4
  circle w0.013: c207.936,208.161 r2.2
  circle w0.013: c207.936,208.161 r4
  circle w0.006: c207.936,96.961 r0.003
  circle w0.013: c207.936,145.961 r4
  circle w0.013: c207.936,145.961 r2.2
  circle w0.013: c207.936,145.961 r4
  circle w0.013: c207.936,208.161 r4
  circle w0.013: c207.936,208.161 r2.2
  circle w0.013: c207.936,208.161 r4
  circle w0.006: c207.936,96.961 r0.003
  lines w0.013: 203.936,163.761 225.636,163.761 ; 203.936,163.761 203.936,145.961 203.936,163.761 ; 203.936,163.761 203.936,165.761 ; 203.936,163.761 225.636,163.761 ; 203.936,163.761 203.936,165.761 ; 203.936,165.761 223.636,165.761 ; 203.936,165.761 223.636,165.761 ; 203.936,198.161 223.636,198.161 ; 203.936,198.161 203.936,200.161 ; 203.936,198.161 223.636,198.161 ; 203.936,198.161 203.936,200.161 ; 203.936,200.161 225.636,200.161 ; 203.936,200.161 203.936,208.161 203.936,200.161 ; 203.936,200.161 225.636,200.161 ; 223.636,165.761 223.636,198.161 ; 223.636,165.761 223.636,198.161 ; 225.636,163.761 225.636,200.161 ; 225.636,163.761 225.636,200.161 ; 211.936,145.961 211.936,163.761 211.936,145.961 ; 211.936,200.161 211.936,208.161 211.936,200.161
Mechanical 23:
  circle w0.013: c158.936,47.961 r4
  circle w0.013: c158.936,145.961 r4
  circle w0.013: c256.936,96.961 r2.2
  circle w0.013: c256.936,145.961 r2.2
  circle w0.006: c270.936,80.061 r0.003
  circle w0.006: c207.936,96.961 r0.003
  circle w0.006: c287.936,153.961 r0.003
  circle w0.013: c158.936,47.961 r4
  circle w0.013: c158.936,145.961 r4
  circle w0.013: c256.936,96.961 r2.2
  circle w0.013: c256.936,145.961 r2.2
  circle w0.006: c270.936,80.061 r0.003
  circle w0.006: c207.936,96.961 r0.003
  circle w0.006: c287.936,153.961 r0.003
  lines w0.013: 246.423,82.061 288.936,82.061 ; 246.423,82.061 246.423,151.961 ; 246.423,82.061 288.936,82.061 ; 246.423,82.061 246.423,151.961 ; 246.423,151.961 288.936,151.961 ; 246.423,151.961 288.936,151.961 ; 288.936,82.061 288.936,151.961 ; 288.936,82.061 288.936,151.961 ; 290.936,-22.039 290.936,215.961 290.936,-22.039
Mechanical 24:
  circle w0.013: c158.936,145.961 r4
  circle w0.013: c158.936,47.961 r4
  circle w0.013: c256.936,96.961 r4
  circle w0.006: c207.936,96.961 r0.003
  circle w0.013: c158.936,145.961 r4
  circle w0.013: c158.936,47.961 r4
  circle w0.013: c256.936,96.961 r4
  circle w0.006: c207.936,96.961 r0.003
Mechanical 25:
  circle w0.013: c256.936,96.961 r2
  circle w0.013: c256.936,145.961 r2
  circle w0.006: c207.936,96.961 r0.003
  circle w0.013: c256.936,96.961 r2
  circle w0.013: c256.936,145.961 r2
  circle w0.006: c207.936,96.961 r0.003
  lines w0.013: 209.35,96.961 254.905,51.407 ; 209.35,96.961 254.905,142.516 ; 209.35,96.961 254.905,51.407 ; 209.35,96.961 254.905,142.516 ; 254.905,51.407 ccw(c256.936,47.961) 255.936,51.834 ; 254.905,51.407 ccw(c256.936,47.961) 255.936,51.834 ; 254.905,142.516 cw(c256.936,145.961) 255.936,142.088 ; 254.905,142.516 cw(c256.936,145.961) 255.936,142.088 ; 255.936,51.834 255.936,93.088 ; 255.936,51.834 255.936,93.088 ; 255.936,93.088 ccw(c256.936,96.961) 255.936,100.834 ; 255.936,93.088 ccw(c256.936,96.961) 255.936,100.834 ; 255.936,100.834 255.936,142.088 ; 255.936,100.834 255.936,142.088
Mechanical 26:
  circle w0.013: c158.936,96.961 r2.2
  circle w0.013: c256.936,96.961 r2
  circle w0.013: c256.936,145.961 r2
  circle w0.006: c207.936,96.961 r0.003
  circle w0.013: c158.936,96.961 r2.2
  circle w0.013: c256.936,96.961 r2
  circle w0.013: c256.936,145.961 r2
  circle w0.006: c207.936,96.961 r0.003
  lines w0.013: 126.936,69.692 169.45,69.692 ; 126.936,69.692 126.936,139.961 ; 126.936,69.692 169.45,69.692 ; 126.936,69.692 126.936,139.961 ; 126.936,139.961 169.45,139.961 ; 126.936,139.961 169.45,139.961 ; 169.45,69.692 169.45,139.961 ; 169.45,69.692 169.45,139.961 ; 209.35,96.961 254.905,51.407 ; 209.35,96.961 254.905,142.516 ; 209.35,96.961 254.905,51.407 ; 209.35,96.961 254.905,142.516 ; 254.905,51.407 ccw(c256.936,47.961) 255.936,51.834 ; 254.905,51.407 ccw(c256.936,47.961) 255.936,51.834 ; 254.905,142.516 cw(c256.936,145.961) 255.936,142.088 ; 254.905,142.516 cw(c256.936,145.961) 255.936,142.088 ; 255.936,51.834 255.936,93.088 ; 255.936,51.834 255.936,93.088 ; 255.936,93.088 ccw(c256.936,96.961) 255.936,100.834 ; 255.936,93.088 ccw(c256.936,96.961) 255.936,100.834 ; 255.936,100.834 255.936,142.088 ; 255.936,100.834 255.936,142.088 ; 124.936,67.692 141.936,67.692 124.936,67.692 ; 154.941,145.762 ccw(c158.936,145.961) 162.936,145.961 cw(c158.936,145.961) 154.941,145.762
Mechanical 27:
  circle w0.013: c256.936,145.961 r2
  circle w0.013: c158.936,96.961 r4
  circle w0.013: c256.936,96.961 r2
  circle w0.006: c207.936,96.961 r0.003
  circle w0.013: c256.936,145.961 r2
  circle w0.013: c158.936,96.961 r4
  circle w0.013: c256.936,96.961 r2
  circle w0.006: c207.936,96.961 r0.003
  lines w0.013: 209.35,96.961 254.905,51.407 ; 209.35,96.961 254.905,142.516 ; 209.35,96.961 254.905,51.407 ; 209.35,96.961 254.905,142.516 ; 254.905,51.407 ccw(c256.936,47.961) 255.936,51.834 ; 254.905,51.407 ccw(c256.936,47.961) 255.936,51.834 ; 254.905,142.516 cw(c256.936,145.961) 255.936,142.088 ; 254.905,142.516 cw(c256.936,145.961) 255.936,142.088 ; 255.936,51.834 255.936,93.088 ; 255.936,51.834 255.936,93.088 ; 255.936,93.088 ccw(c256.936,96.961) 255.936,100.834 ; 255.936,93.088 ccw(c256.936,96.961) 255.936,100.834 ; 255.936,100.834 255.936,142.088 ; 255.936,100.834 255.936,142.088
Mechanical 28:
  circle w0.013: c256.936,145.961 r2
  circle w0.013: c256.936,96.961 r2
  circle w0.013: c158.936,96.961 r2
  circle w0.006: c207.936,96.961 r0.003
  circle w0.013: c256.936,145.961 r2
  circle w0.013: c256.936,96.961 r2
  circle w0.013: c158.936,96.961 r2
  circle w0.006: c207.936,96.961 r0.003
  lines w0.013: 209.35,96.961 254.905,51.407 ; 209.35,96.961 254.905,142.516 ; 209.35,96.961 254.905,51.407 ; 209.35,96.961 254.905,142.516 ; 254.905,51.407 ccw(c256.936,47.961) 255.936,51.834 ; 254.905,51.407 ccw(c256.936,47.961) 255.936,51.834 ; 254.905,142.516 cw(c256.936,145.961) 255.936,142.088 ; 254.905,142.516 cw(c256.936,145.961) 255.936,142.088 ; 255.936,51.834 255.936,93.088 ; 255.936,51.834 255.936,93.088 ; 255.936,93.088 ccw(c256.936,96.961) 255.936,100.834 ; 255.936,93.088 ccw(c256.936,96.961) 255.936,100.834 ; 255.936,100.834 255.936,142.088 ; 255.936,100.834 255.936,142.088
Mechanical 29:
  circle w0.006: c153.936,96.961 r0.003
  circle w0.006: c153.936,96.961 r0.003
  lines w0.013: 153.936,151.861 153.936,168.97 153.936,151.861 ; 153.936,151.861 153.936,165.961 ; 153.936,151.861 153.936,165.961 ; 153.936,165.894 153.936,165.861 153.936,165.894 ; 153.936,165.894 153.936,165.961 ; 153.936,165.894 153.936,165.961 ; 153.936,165.961 153.936,167.861 153.936,165.961 ; 153.936,194.061 153.936,192.061 153.936,194.061 ; 153.936,194.061 153.936,197.461 ; 153.936,194.061 153.936,197.461 ; 153.936,197.461 153.936,195.758 153.936,197.461 ; 138.139,183.553 cw(c153.936,179.961) 170.036,181.759 ccw(c153.936,179.961) 138.139,183.553 ; 139.836,181.644 cw(c153.936,179.961) 168.036,181.644 ccw(c153.936,179.961) 139.836,181.644 ; 141.836,179.961 cw(c153.936,179.961) 166.036,179.961 ccw(c153.936,179.961) 141.836,179.961 ; 153.936,145.762 153.936,162.861 153.936,145.762 ; 153.936,197.061 153.936,202.449 153.936,197.061
Mechanical 30:
  circle w0.006: c203.936,96.961 r0.003
  circle w0.006: c203.936,96.961 r0.003
  lines w0.013: 203.936,145.961 203.936,165.761 ; 203.936,145.961 203.936,161.761 203.936,145.961 ; 203.936,145.961 203.936,165.761 ; 203.936,163.761 203.936,151.761 203.936,163.761 ; 203.936,163.761 203.936,173.899 ; 203.936,163.761 203.936,173.899 ; 203.936,165.761 203.936,173.899 ; 203.936,165.761 203.936,173.899 ; 203.936,190.024 203.936,198.161 ; 203.936,190.024 203.936,200.161 ; 203.936,190.024 203.936,198.161 ; 203.936,190.024 203.936,200.161 ; 203.936,198.161 203.936,208.161 ; 203.936,198.161 203.936,208.161 ; 203.936,200.161 ccw(c203.936,202.161) 205.936,202.161 cw(c203.936,202.161) 203.936,200.161 ; 203.936,200.161 203.936,203.161 203.936,200.161 ; 203.936,208.161 203.936,202.161 203.936,208.161 ; 201.936,161.761 ccw(c203.936,161.761) 203.936,159.761 cw(c203.936,161.761) 201.936,161.761
Mechanical 31:
  circle w0.006: c207.936,96.961 r0.003
  circle w0.006: c207.936,96.961 r0.003
  lines w0.013: 199.436,83.461 216.436,110.461 ; 199.436,110.461 216.436,83.461 ; 199.436,85.061 ccw(c201.036,85.061) 201.036,83.461 214.836,83.461 ccw(c214.836,85.061) 216.436,85.061 216.436,108.861 ccw(c214.836,108.861) 214.836,110.461 201.036,110.461 ccw(c201.036,108.861) 199.436,108.861 199.436,85.061
Mechanical 32:
  circle w0.006: c207.936,96.961 r0.003
  lines w0.013: 199.436,85.061 ccw(c201.036,85.061) 201.036,83.461 214.836,83.461 ccw(c214.836,85.061) 216.436,85.061 216.436,108.861 ccw(c214.836,108.861) 214.836,110.461 201.036,110.461 ccw(c201.036,108.861) 199.436,108.861 199.436,85.061 ; 199.671,85.061 ccw(c201.036,85.061) 201.036,83.696 214.836,83.696 ccw(c214.836,85.061) 216.201,85.061 216.201,108.861 ccw(c214.836,108.861) 214.836,110.226 201.036,110.226 ccw(c201.036,108.861) 199.671,108.861 199.671,85.061 ; 199.906,85.061 ccw(c201.036,85.061) 201.036,83.931 214.836,83.931 ccw(c214.836,85.061) 215.966,85.061 215.966,108.861 ccw(c214.836,108.861) 214.836,109.991 201.036,109.991 ccw(c201.036,108.861) 199.906,108.861 199.906,85.061
Mechanical 33:
  circle w0.013: c207.936,96.961 r4.1
  circle w0.006: c207.936,96.961 r0.003
  lines w0.013: 199.436,85.061 ccw(c201.036,85.061) 201.036,83.461 214.836,83.461 ccw(c214.836,85.061) 216.436,85.061 216.436,108.861 ccw(c214.836,108.861) 214.836,110.461 201.036,110.461 ccw(c201.036,108.861) 199.436,108.861 199.436,85.061
Mechanical 34:
  circle w0.013: c207.936,105.461 r3
  circle w0.013: c207.936,96.961 r4.1
  circle w0.006: c207.936,96.961 r0.003
  lines w0.013: 207.936,96.961 207.936,105.461 ; 199.636,85.061 ccw(c201.036,85.061) 201.036,83.661 214.836,83.661 ccw(c214.836,85.061) 216.236,85.061 216.236,108.861 ccw(c214.836,108.861) 214.836,110.261 201.036,110.261 ccw(c201.036,108.861) 199.636,108.861 199.636,85.061
Mechanical 35:
  circle w0.013: c207.936,96.961 r8.5
  circle w0.013: c207.936,96.961 r4.3
  circle w0.013: c207.936,105.461 r3.2
  circle w0.013: c207.936,96.961 r10.7
  circle w0.013: c207.936,96.961 r6.3
  circle w0.013: c207.936,96.961 r8.7
  circle w0.013: c207.936,96.961 r6.5
  circle w0.013: c207.936,96.961 r13.1
  circle w0.013: c207.936,96.961 r12.9
  circle w0.013: c207.936,96.961 r10.9
  circle w0.013: c207.936,96.961 r4.1
  circle w0.013: c207.936,105.461 r3
  circle w0.006: c207.936,96.961 r0.003
  lines w0.013: 199.636,85.061 ccw(c201.036,85.061) 201.036,83.661 214.836,83.661 ccw(c214.836,85.061) 216.236,85.061 216.236,108.861 ccw(c214.836,108.861) 214.836,110.261 201.036,110.261 ccw(c201.036,108.861) 199.636,108.861 199.636,85.061
Mechanical 36:
  circle w0.013: c215.366,84.531 r0.6
  circle w0.013: c200.506,84.531 r0.6
  circle w0.013: c200.506,109.391 r0.6
  circle w0.013: c215.366,109.391 r0.6
  circle w0.013: c207.936,105.461 r3
  circle w0.013: c207.936,96.961 r4.3
  circle w0.013: c207.936,96.961 r4.1
  circle w0.013: c207.936,105.461 r3.2
  circle w0.006: c207.936,96.961 r0.003
  circle w0.006: c207.936,105.461 r0.003
  circle w0.006: c207.936,96.961 r0.003
  circle w0.006: c207.936,96.961 r0.003
  lines w0.013: 199.906,90.625 204.525,94.343 ; 199.906,96.733 207.836,90.368 ; 199.906,97.206 205.654,103.219 ; 199.906,105.217 204.893,100 ; 200.043,97.06 205.798,103.08 ; 200.043,105.363 205.038,100.138 ; 200.064,96.863 207.836,90.625 ; 200.066,90.496 204.65,94.188 ; 200.168,109.584 205.08,106.905 ; 200.17,84.336 207.675,90.296 ; 200.237,84.262 207.836,90.296 ; 200.312,84.194 207.836,90.169 ; 200.315,109.732 205.176,107.081 ; 207.936,63.494 207.936,96.961 ; 208.036,90.169 215.561,84.194 ; 208.036,90.368 215.966,96.733 ; 208.036,90.496 215.966,96.861 ; 208.036,90.625 215.809,96.863 ; 208.197,90.296 215.703,84.336 ; 210.074,103.08 215.83,97.06 ; 210.219,103.219 215.966,97.206 ; 210.696,107.081 215.557,109.732 ; 210.792,106.905 215.705,109.584 ; 210.834,100.138 215.83,105.363 ; 210.979,100 215.966,105.217 ; 211.222,94.188 215.807,90.496 ; 211.347,94.343 215.966,90.625 ; 215.635,109.66 207.936,105.461 199.906,97.061 ; 199.906,90.496 207.936,96.961 ; 199.906,90.496 215.966,90.496 215.966,90.296 199.906,90.296 199.906,90.496 ; 199.906,96.861 215.966,97.061 ; 199.906,96.861 199.906,97.061 ; 199.906,96.861 215.966,96.861 ; 199.906,97.061 215.966,97.061 ; 199.906,97.061 215.966,96.861 ; 199.906,105.361 207.936,96.961 ; 199.906,105.361 215.966,105.561 ; 199.906,105.361 199.906,105.561 ; 199.906,105.361 215.966,105.361 ; 199.906,105.561 215.966,105.361 ; 199.906,105.561 215.966,105.561 ; 207.836,83.931 208.036,109.991 ; 207.836,83.931 207.836,109.991 ; 207.836,83.931 208.036,83.931 ; 207.836,109.991 208.036,83.931 ; 207.836,109.991 208.036,109.991 ; 208.036,83.931 208.036,109.991 ; 215.966,96.861 215.966,97.061 ; 215.966,105.361 215.966,105.561 ; 199.906,85.061 ccw(c201.036,85.061) 201.036,83.931 214.836,83.931 ccw(c214.836,85.061) 215.966,85.061 215.966,108.861 ccw(c214.836,108.861) 214.836,109.991 201.036,109.991 ccw(c201.036,108.861) 199.906,108.861 199.906,85.061
Mechanical 37:
  circle w0.013: c207.936,96.961 r4.1
  circle w0.013: c207.936,105.461 r3
  circle w0.006: c200.506,84.531 r0.003
  circle w0.006: c215.366,109.391 r0.003
  circle w0.006: c200.506,109.391 r0.003
  circle w0.006: c207.936,96.961 r0.003
  circle w0.006: c215.366,84.531 r0.003
  lines w0.013: 199.671,85.061 ccw(c201.036,85.061) 201.036,83.696 214.836,83.696 ccw(c214.836,85.061) 216.201,85.061 216.201,108.861 ccw(c214.836,108.861) 214.836,110.226 201.036,110.226 ccw(c201.036,108.861) 199.671,108.861 199.671,85.061 ; 199.906,85.061 ccw(c201.036,85.061) 199.949,84.754 cw(c200.506,84.531) 200.939,84.947 207.675,90.296 199.906,90.296 199.906,85.061 ; 199.906,90.625 199.906,96.861 203.637,96.861 ccw(c207.936,96.961) 204.525,94.343 199.906,90.625 ; 199.906,97.061 203.637,97.061 cw(c207.936,96.961) 204.893,100 199.906,105.217 199.906,97.061 ; 199.906,105.561 204.738,105.561 cw(c207.936,105.461) 207.836,108.66 207.836,109.991 201.036,109.991 ccw(c201.036,108.861) 200.729,109.949 cw(c200.506,109.391) 199.949,109.169 ccw(c201.036,108.861) 199.906,108.861 199.906,105.561 ; 200.045,105.361 204.738,105.361 ccw(c207.936,105.461) 207.836,102.263 207.836,101.26 ccw(c207.936,96.961) 205.038,100.138 200.045,105.361 ; 200.066,90.496 207.836,90.496 207.836,92.663 cw(c207.936,96.961) 204.65,94.188 200.066,90.496 ; 200.729,83.974 ccw(c201.036,85.061) 201.036,83.931 207.836,83.931 207.836,90.169 201.052,84.781 cw(c200.506,84.531) 200.729,83.974 ; 208.036,83.931 214.836,83.931 ccw(c214.836,85.061) 215.144,83.974 cw(c215.366,84.531) 214.821,84.781 208.036,90.169 208.036,83.931 ; 208.036,90.496 215.807,90.496 211.222,94.188 cw(c207.936,96.961) 208.036,92.663 208.036,90.496 ; 208.036,101.26 cw(c207.936,96.961) 210.834,100.138 215.828,105.361 211.135,105.361 cw(c207.936,105.461) 208.036,102.263 208.036,101.26 ; 208.036,108.66 cw(c207.936,105.461) 211.135,105.561 215.966,105.561 215.966,108.861 ccw(c214.836,108.861) 215.924,109.169 cw(c215.366,109.391) 215.144,109.949 ccw(c214.836,108.861) 214.836,109.991 208.036,109.991 208.036,108.66 ; 208.197,90.296 214.934,84.947 cw(c215.366,84.531) 215.924,84.754 ccw(c214.836,85.061) 215.966,85.061 215.966,90.296 208.197,90.296 ; 210.979,100 cw(c207.936,96.961) 212.235,97.061 215.966,97.061 215.966,105.217 210.979,100 ; 211.347,94.343 ccw(c207.936,96.961) 212.235,96.861 215.966,96.861 215.966,90.625 211.347,94.343
Mechanical 38:
  circle w0.006: c207.936,96.961 r0.003
  circle w0.006: c207.936,96.961 r0.003
  lines w0.013: 199.436,83.461 199.436,110.461 ; 199.436,83.461 216.436,83.461 ; 199.436,83.461 216.436,110.461 ; 199.436,110.461 216.436,83.461 ; 199.436,110.461 216.436,110.461 ; 216.436,83.461 216.436,110.461
Mechanical 39:
  circle w0.013: c207.936,96.961 r4.75
  circle w0.006: c207.936,96.961 r0.003
  lines w0.013: 199.436,83.461 199.436,110.461 216.436,110.461 216.436,83.461 199.436,83.461
Mechanical 40:
  circle w0.006: c207.936,96.961 r0.003
  lines w0.013: 199.436,93.496 216.436,93.496 ; 201.436,93.496 201.436,87.061 ccw(c203.036,87.061) 203.036,85.461 212.836,85.461 ccw(c212.836,87.061) 214.436,87.061 214.436,93.496 ; 199.436,85.061 ccw(c201.036,85.061) 201.036,83.461 214.836,83.461 ccw(c214.836,85.061) 216.436,85.061 216.436,108.861 ccw(c214.836,108.861) 214.836,110.461 201.036,110.461 ccw(c201.036,108.861) 199.436,108.861 199.436,85.061